# Altium PCB JH MCU Board.PcbDoc
Units mm, origin at the board's own origin, x right, y up, seen from the top; angles counter-clockwise.
Board outline 96 x 90.1 mm, 2 copper layers (Top Layer, Bottom Layer); 11 components, 65 nets, 222 pads, 102 vias.
Unrouted connection lines stored in the file: 47.
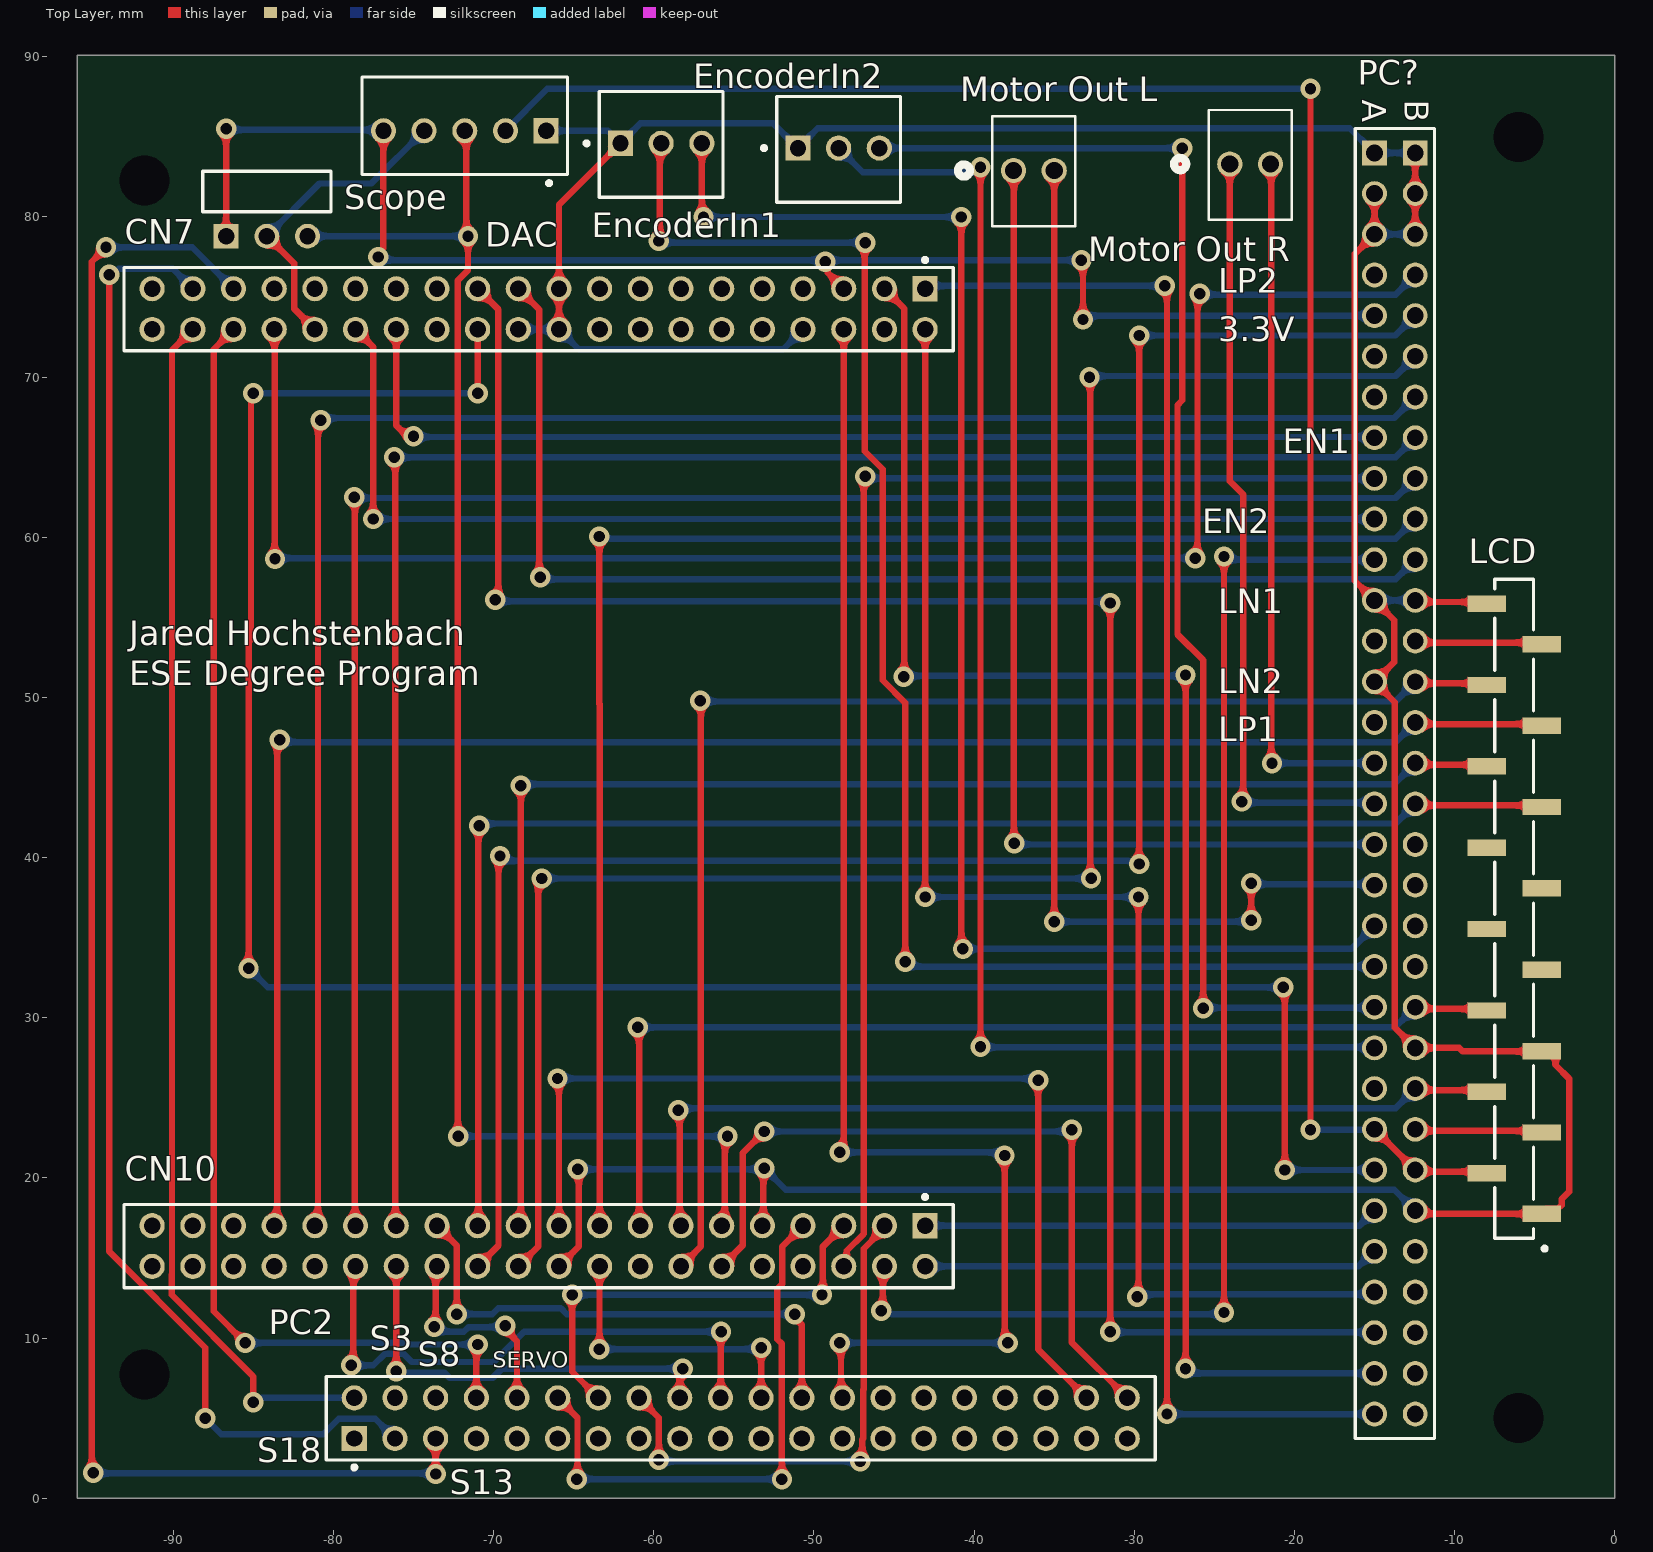
[diagram p0: Top Layer view]
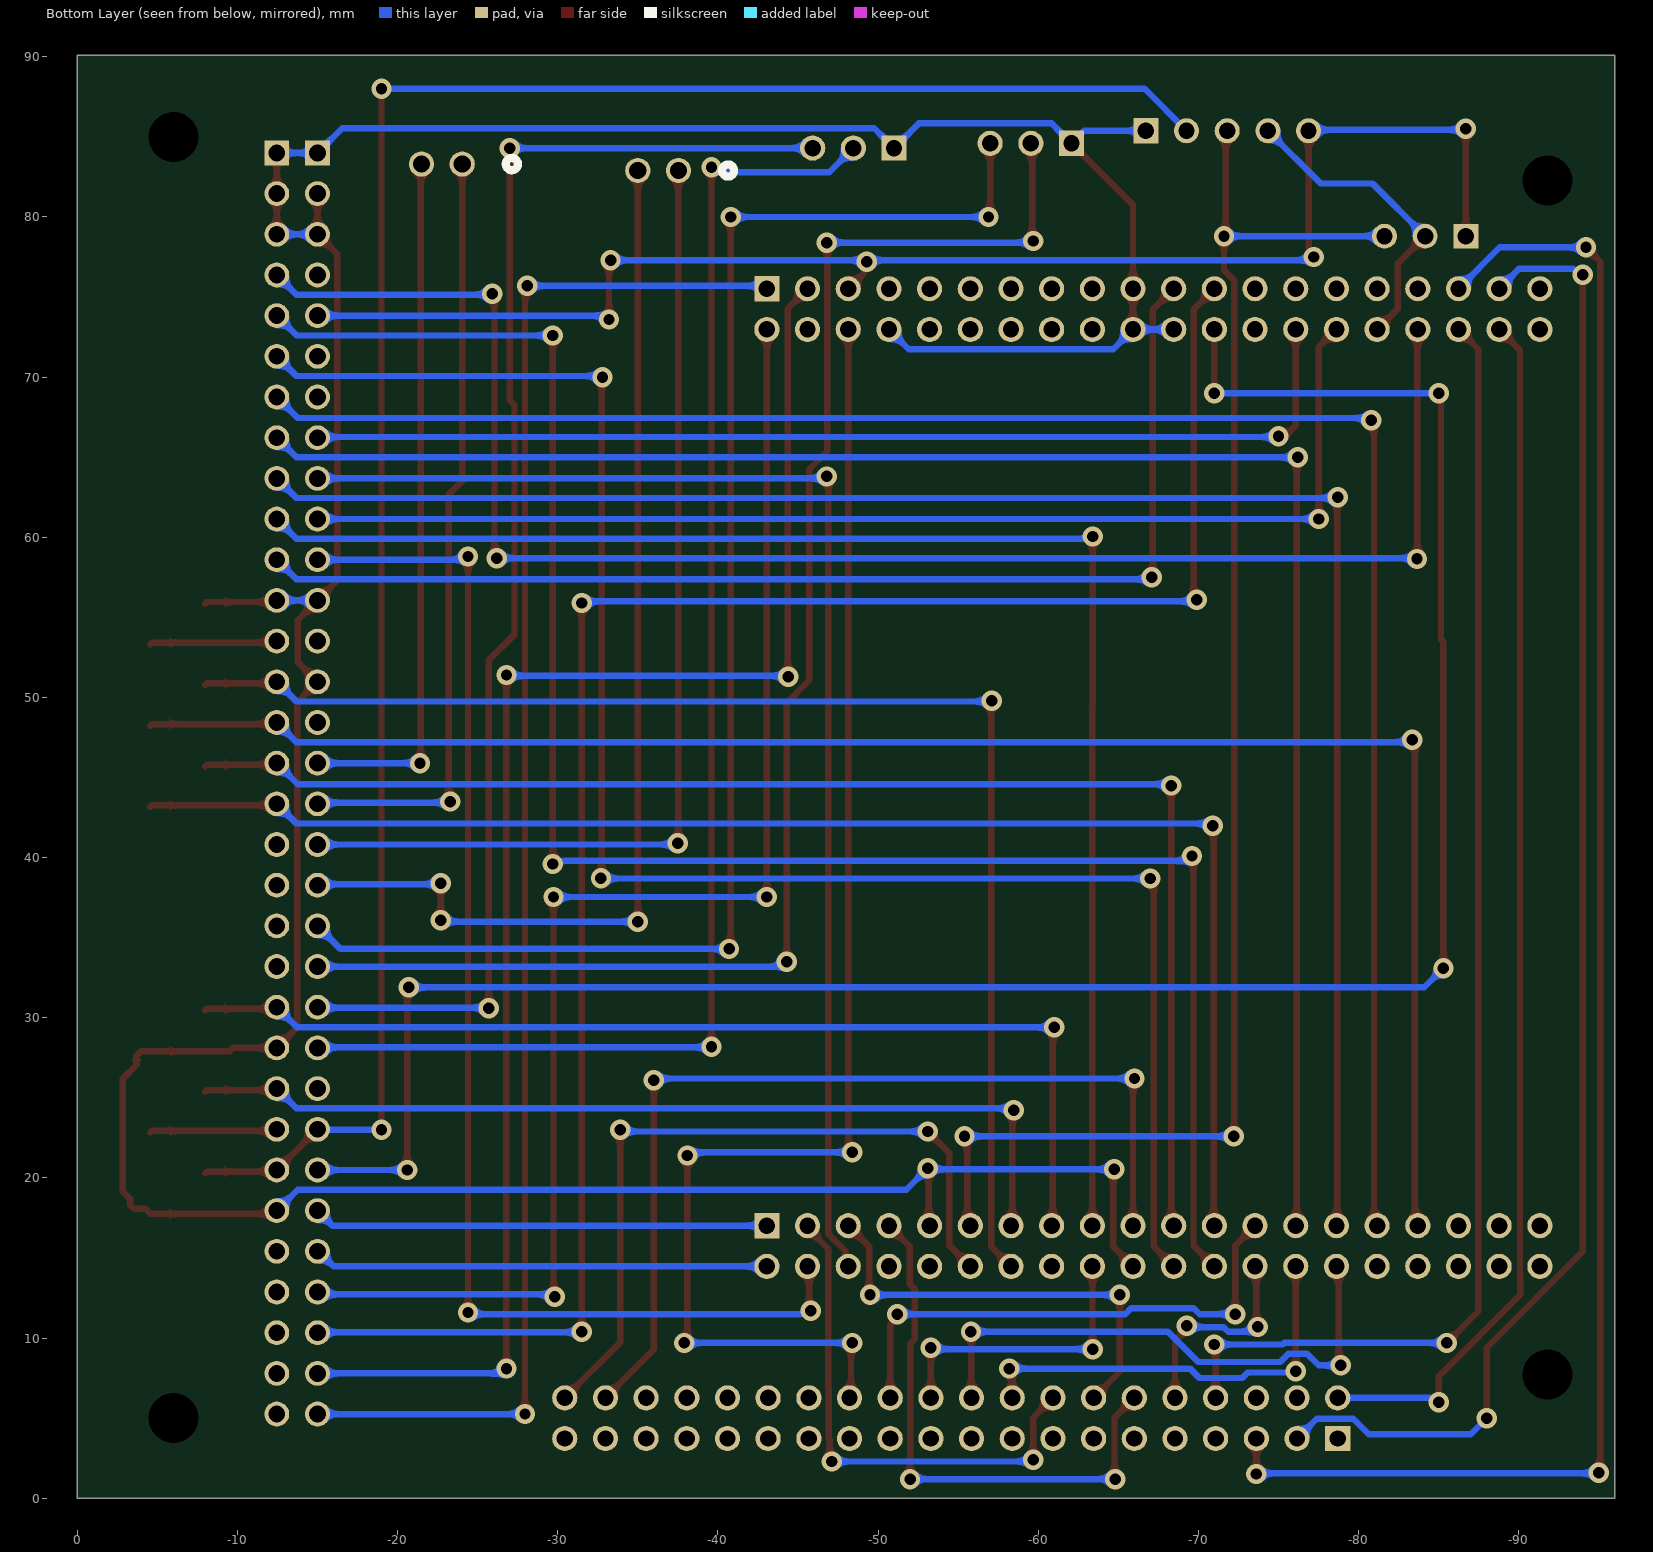
[diagram p1: Bottom Layer view, seen from below]
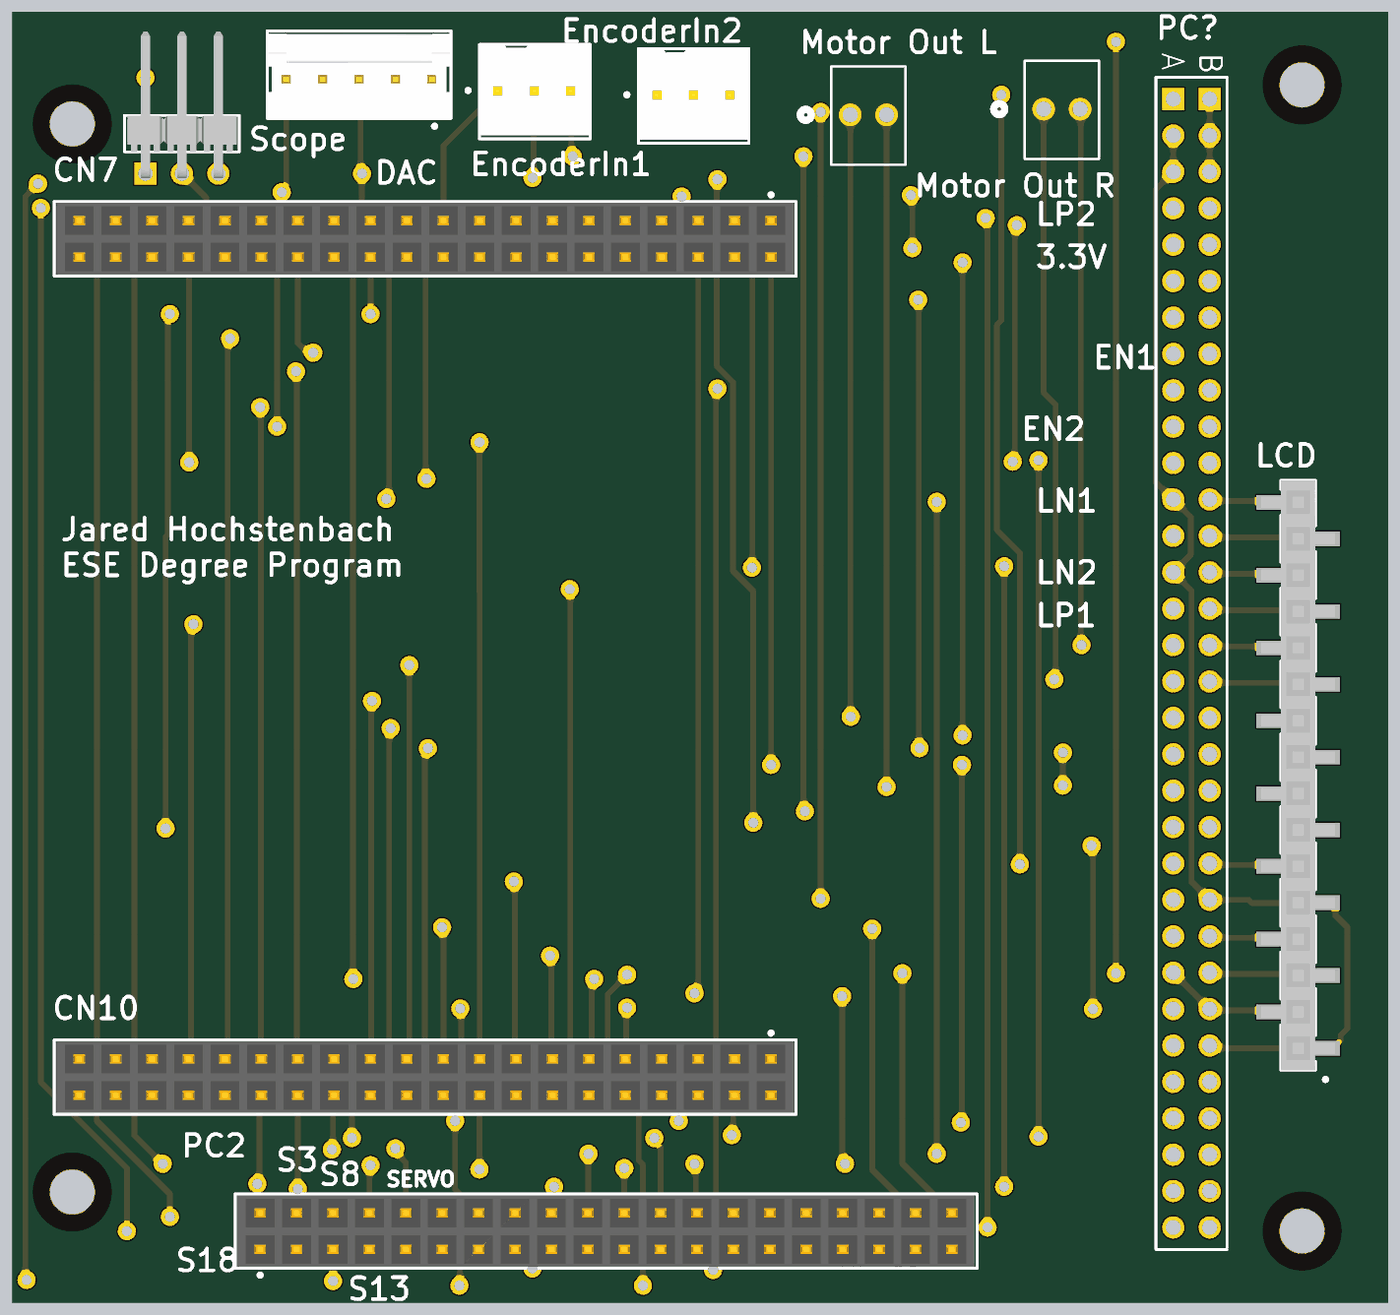
[diagram p2: 3D render of the assembled board from above, using the file's embedded part models]

## Layer stack, top to bottom
Top Solder: solder mask 0.0102, Solder Resist, Dk 3.5
Top Layer: signal copper 0.0356
Dielectric 1: dielectric 0.32, FR-4, Dk 4.8
Bottom Layer: signal copper 0.0356
Bottom Solder: solder mask 0.0102, Solder Resist, Dk 3.5

## Board outline
-96,0 0,0 0,90.1 -96,90.1

## Design rules (kind name [scope] priority, off if disabled: settings)
Clearance [All] p1: gap=0.254 ignorepadtopadclearanceinfootprint=FALSE except(0: Arc-Hole Track-Hole SMDPad-Hole THPad-Hole Via-Hole Fill-Hole Poly-Hole Region-Hole Text-Hole)
PolygonConnect [All] p1: connectstyle=Relief reliefconductorwidth=0.254 reliefentries=4 polygonreliefangle="90 Angle" airgapwidth=0.254
RoomDefinition "JH MCU Board 2" [InComponentClass('JH MCU Board 2')] p1: confinementstyle=ConfineIn formatcopy=TRUE lockcomponents=FALSE outline -96,0 0,0 0,90 -96,90
RoomDefinition "JH MCUBoardsheet" [InComponentClass('JH MCUBoardsheet')] p2: confinementstyle=ConfineIn formatcopy=TRUE lockcomponents=FALSE outline -96,0 0,0 0,90 -96,90
RoutingVias [All] p1: holewidth=0.711 width=1.27 viastyle="Through Hole" minholewidth=0.711 minwidth=1.27 maxholewidth=0.711 maxwidth=1.27
SolderMaskExpansion [All] p1: expansion=0.102 istentingtop=FALSE
Width [All] p1: maxlimit=1 minlimit=0.254 preferedwidth=0.4 minimp=50.000000 maximp=50.000000 favimp=50.000000
30 further rules are at their usual default settings.

## Classes and differential pairs
component class "JH MCU Board 2": DAC EncoderIn1 EncoderIn2 "Motor Out L" "Motor Out R" "Scope "
component class "JH MCUBoardsheet": CN7 CN10 LCD PC2 PC?

## Components (designator, comment, footprint, x,y, rotation, side; value= is the part's Value field where it differs from the comment)
CN7 "M20-6102045" FP-M20-6102045-MFG -67.19,74.25 r180 top
CN10 "M20-6102045" FP-M20-6102045-MFG -67.19,15.75 r180 top
DAC "3-641215-5" FP-3-641215-5-MFG -71.8,85.7 r0 top (schematic designator ?)
EncoderIn1 "22-11-2032" FP-22-11-2032-MFG -59.54,84.525 r0 top
EncoderIn2 "22-11-2032" FP-22-11-2032-MFG -48.46,84.225 r0 top
LCD "SSW-116-22-F-S-VS" SMTC-SSW-116-22-X-S-VS -6.285,36.81 r90 top (schematic designator J?)
"Motor Out L" "22112022" CONN_22-11-2022_MOL -37.54,82.9 r0 top
"Motor Out R" "22112022" CONN_22-11-2022_MOL -24.04,83.3 r0 top
PC2 "M20-6102045" FP-M20-6102045-MFG -54.57,5 r0 top
PC? "PC104-CN-2P-F-R64" BTB2-54-V64F-04 -15,84 r270 top
Scope "TSW-103-08-L-S-RA" SMTC-TSW-103-08-X-S-RA -86.7,78.8 r0 top (schematic designator "Scope Connector?")

## Footprints (in the part's own frame and the unit in brackets; to place one, negate y for a bottom-side part, rotate by r counter-clockwise, add the part's x,y. Pads: shape width x height; smd on the part's side, far side on the other; paste and mask are expansions set on the pad)
BTB2-54-V64F-04 [mm] "Board-to-Board Connector, PC104 BA ISA, Stackthrough, Vertical, 2-Row, 64-Postion, Pitch 2.54mm,  Receptacle , Height 11.05mm"
  rect 1.55x1.55 hole 1.05: A1(0,0) B1(0,2.54)
  round 1.55 hole 1.05: A2(2.54,0) A3(5.08,0) A4(7.62,0) A5(10.16,0) A6(12.7,0) A7(15.24,0) A8(17.78,0) A9(20.32,0) A10(22.86,0) A11(25.4,0) A12(27.94,0) A13(30.48,0) A14(33.02,0) A15(35.56,0) A16(38.1,0) A17(40.64,0) A18(43.18,0) A19(45.72,0) A20(48.26,0) A21(50.8,0) A22(53.34,0) A23(55.88,0) A24(58.42,0) A25(60.96,0) A26(63.5,0) A27(66.04,0) A28(68.58,0) A29(71.12,0) A30(73.66,0) A31(76.2,0) A32(78.74,0) B2(2.54,2.54) B3(5.08,2.54) B4(7.62,2.54) B5(10.16,2.54) B6(12.7,2.54) B7(15.24,2.54) B8(17.78,2.54) B9(20.32,2.54) B10(22.86,2.54) B11(25.4,2.54) B12(27.94,2.54) B13(30.48,2.54) B14(33.02,2.54) B15(35.56,2.54) B16(38.1,2.54) B17(40.64,2.54) B18(43.18,2.54) B19(45.72,2.54) B20(48.26,2.54) B21(50.8,2.54) B22(53.34,2.54) B23(55.88,2.54) B24(58.42,2.54) B25(60.96,2.54) B26(63.5,2.54) B27(66.04,2.54) B28(68.58,2.54) B29(71.12,2.54) B30(73.66,2.54) B31(76.2,2.54) B32(78.74,2.54)
  silkscreen extent -1.52,-1.2 80.27,3.75, body extent -1.6,-1.2 80.34,3.75, height 11.05
CONN_22-11-2022_MOL [mil]
  round 62 hole 42 mask+0: 1(0,0) 2(100,0)
  silkscreen extent -137,-137 152,133, body extent 0,0 10,10, height 10
FP-3-641215-5-MFG [mil]
  rect 61.65x61.65 hole 40 paste-39370.1 mask+0: 1(200,-12.5)
  round 61.65 hole 40 paste-39370.1 mask+0: 2(100,-12.5) 3(0,-12.5) 4(-100,-12.5) 5(-200,-12.5)
  silkscreen extent -252,-146 252,120, body extent -256,-124 256,124, height 10
FP-22-11-2032-MFG [mm]
  rect 1.57x1.57 hole 1.02 paste-1000 mask+0: 1(-2.54,0.075)
  round 1.57 hole 1.02 paste-1000 mask+0: 2(0,0.075) 3(2.54,0.075)
  silkscreen extent -4.78,-3.3 3.86,3.3, body extent -3.96,-3.4 3.96,3.4, height 0.25
FP-M20-6102045-MFG [mm]
  rect 1.57x1.57 hole 1.02 paste-1000 mask+0: 1(-24.13,-1.27)
  round 1.57 hole 1.02 paste-1000 mask+0: 2(-24.13,1.27) 3(-21.59,-1.27) 4(-21.59,1.27) 5(-19.05,-1.27) 6(-19.05,1.27) 7(-16.51,-1.27) 8(-16.51,1.27) 9(-13.97,-1.27) 10(-13.97,1.27) 11(-11.43,-1.27) 12(-11.43,1.27) 13(-8.89,-1.27) 14(-8.89,1.27) 15(-6.35,-1.27) 16(-6.35,1.27) 17(-3.81,-1.27) 18(-3.81,1.27) 19(-1.27,-1.27) 20(-1.27,1.27) 21(1.27,-1.27) 22(1.27,1.27) 23(3.81,-1.27) 24(3.81,1.27) 25(6.35,-1.27) 26(6.35,1.27) 27(8.89,-1.27) 28(8.89,1.27) 29(11.43,-1.27) 30(11.43,1.27) 31(13.97,-1.27) 32(13.97,1.27) 33(16.51,-1.27) 34(16.51,1.27) 35(19.05,-1.27) 36(19.05,1.27) 37(21.59,-1.27) 38(21.59,1.27) 39(24.13,-1.27) 40(24.13,1.27)
  silkscreen extent -25.88,-3.19 25.88,2.6, body extent -25.98,-2.7 25.98,2.7, height 0.25
SMTC-SSW-116-22-X-S-VS [mm] "SQ Post Socket, 16 Pins, Vertical, 2.54mm Pitch, Female"
  rect 1.02x2.41 smd: 1(-19.05,-1.715) 2(-16.51,1.715) 3(-13.97,-1.715) 4(-11.43,1.715) 5(-8.89,-1.715) 6(-6.35,1.715) 7(-3.81,-1.715) 8(-1.27,1.715) 9(1.27,-1.715) 10(3.81,1.715) 11(6.35,-1.715) 12(8.89,1.715) 13(11.43,-1.715) 14(13.97,1.715) 15(16.51,-1.715) 16(19.05,1.715)
  silkscreen extent -21.35,-2.03 20.58,1.2, body extent -20.57,-2.58 20.57,2.58, height 9.78
SMTC-TSW-103-08-X-S-RA [mm] ".025 SQ Post Terminal Strip Assembly, 1x3 Pins, Right Angle, 2.54mm Pitch, Male"
  rect 1.55x1.55 hole 1.02: 1(0,0)
  round 1.55 hole 1.02: 2(2.54,0) 3(5.08,0)
  silkscreen extent -1.46,1.52 6.54,4.06, body extent -1.27,-0.32 6.35,9.9, height 3.05

## Part data
CN7 CN10 PC2: library part CMP-15831-000080-1, "CONN STKTHRU PC/104 40POS PCB", Color=Black, Contact Resistance=30mR, Current Rating=3A, Flammability Rating="UL94 V-0", Insulation Resistance=5GR, Max Operating Temperature=105°C, Min Operating Temperature=-55°C, Package Quantity=11, Contact Material=Bronze, Contact Plating=Gold, Depth=5.25mm, Gender=Receptacle, Housing Color=Black, Housing Material=Nylon, Length=51.46mm, Material=Nylon, Max Current Rating=3A, Mount="Through Hole", Number of Contacts=40, Number of Positions=40, Number of Rows=2, Orientation=Straight, Packaging=Rail/Tube, Pitch=2.54mm, Radiation Hardening=No, REACH SVHC="No SVHC", Series=M20, Termination=Solder, Weight=0.218205oz
DAC: library part CMP-03369-000062-1, "CONN HEADER VERT 5POS 2.54MM", Current Rating=5A, Manufacturer="TE Connectivity", Temperature="-55°C to +105°C", Temperature Range High=+105°C, Temperature Range Low=-55°C, Voltage Rating=250V, Automotive=No, Category=Conn, ComponentLink2Description=Datasheet, ComponentLink2URL=https://www.te.com/commerce/DocumentDelivery/DDEController?Action=showdoc&DocId=Specification+Or+Standard%7F108-1050%7FL%7Fpdf%7FEnglish%7FENG_SS_108-1050_L.pdf%7F3-641215-5, Conn Gender=Male, Conn Orientation=Vertical, Contact Material=Gold,Nickel, Device Class L1=Connectors, Device Class L2="Headers and Wire Housings", Device Class L3=unset, Digikey Description="CONN HEADER VERT 5POS 2.54MM", Footprint Url=https://www.te.com/commerce/DocumentDelivery/DDEController?Action=showdoc&DocId=Customer+Drawing%7F641215%7FZ4%7Fpdf%7FEnglish%7FENG_CD_641215_Z4.pdf%7F3-641215-5, Height=0.415inch, Lead Free=Yes, Manufacturer Part Number=3-641215-5, Mouser Description="Headers & Wire Housings FRICTION LCK HDR 5P Straight Post gold", Number of Contacts=5, Number of Rows=1, Octopart=https://octopart.com/3-641215-5-te+connectivity-40938285, Package=3-641215-5, Pitch=2.54mm, RoHS=TRUE
EncoderIn1 EncoderIn2: library part CMP-04776-000113-1, "CONN HEADER VERT 3POS 2.54MM", Current Rating=4A, Manufacturer=Molex, Temperature="-40°C to +80°C", Temperature Range High=+80°C, Temperature Range Low=-40°C, Voltage Rating=500V, Automotive=No, Category=Conn, ComponentLink2Description=Datasheet, ComponentLink2URL=https://www.molex.com/webdocs/datasheets/pdf/en-us/0022112032_PCB_HEADERS.pdf, Conn Gender=Male, Conn Orientation=Vertical, Contact Material=Gold,Nickel, Device Class L1=Connectors, Device Class L2="Headers and Wire Housings", Device Class L3=unset, Digikey Description="CONN HEADER VERT 3POS 2.54MM", Footprint Url=https://www.molex.com/pdm_docs/sd/022112032_sd.pdf, Height=10.91mm, Lead Free=Yes, Manufacturer Part Number=22-11-2032, Mounting Type="Through Hole", Mouser Description="KK® 254 Solid Header, Vertical, with Friction Lock, 3 Circuits, Gold (Au) Plating", Number of Contacts=3, Number of Rows=1, Octopart=https://octopart.com/22-11-2032-molex-10085, Package=22-11-2032, Pitch=2.54mm, RoHS=TRUE
LCD: library part CMP-1023-00451-1, "SQ Post Socket, Surface Mount, Vertical, -55 to 125 degC, 2.54 mm Pitch, 16-Pin, Female, RoHS", Manufacturer=Samtec, Temperature Range="-55 to 125 degC", ComponentLink1Description="Manufacturer URL", ComponentLink1URL=http://www.samtec.com, ComponentLink2Description=Datasheet, ComponentLink2URL=http://www.samtec.com/documents/webfiles/pdf/SSW_SM.PDF, ComponentLink3Description="Package Specification", ComponentLink3URL=http://www.samtec.com/documents/webfiles/cpdf/SSW-1XX-22-XXX-X-XX-XX-X-XX-MKT.pdf, DatasheetVersion=F-214, Mounting Technology="Surface Mount", Orientation=Vertical, PackageDescription=".100 [2.54] Surface Mount Assembly", PackageReference=SSW-116-22-X-S-VS, PackageVersion="AS, 1/1997", PartNumber=SSW-116-22-F-S-VS, Pitch="2.54 mm", RoHS=True
"Motor Out L" "Motor Out R": "No Description Available", Mfr_Name="Molex Connector Corporation", Copyright="Copyright (C) 2023 Ultra Librarian. All rights reserved.", Manufacturer_Part_Number=22112022, RefDes=RefDes, Type=DEV
PC?: library part CMP-0001-00110-1, "Board-to-Board Connector, PC104 BA ISA, Stackthrough, Vertical, 2-Row, 64-Postion, Pitch 2.54mm,  Receptacle, Height 11.05mm", Package Reference=BTB2-54-V64F-04, ClassName="Board Template Connector", Mating Connector="Harwin-M20-6103205 (stackthrough)", Publisher=Altium
Scope: library part CMP-1024-00343-1, "0.025\" SQ Post Header, Through-hole, Right Angle, -55 to 125 degC, 2.54 mm Pitch, 3-Pin, Male, RoHS", Manufacturer=Samtec, Temperature Range="-55 to 125 degC", ComponentLink1Description="Manufacturer URL", ComponentLink1URL=http://www.samtec.com, ComponentLink2Description=Datasheet, ComponentLink2URL=http://www.samtec.com/documents/webfiles/pdf/TSW_TH.PDF, ComponentLink3Description="Package Specification", ComponentLink3URL=http://www.samtec.com/documents/webfiles/cpdf/TSW-XXX-XX-XXX-X-XX-XXX-MKT.pdf, DatasheetVersion=F-214, Mounting Technology=Through-hole, Orientation="Right Angle", PackageDescription=".025[0.64] SQ. Post Terminal Strip Assembly", PackageReference=TSW-103-08-X-S-RA, PackageVersion="DM, 8/1988", PartNumber=TSW-103-08-L-S-RA, Pitch="2.54 mm", RoHS=True

## Free pads (board coordinates)
  round 1.524 hole 3.12 mask+2: 4(-91.81,7.735) 4(-91.81,82.265) 4(-6.01,5.01) 4(-6.01,84.99)

## Via types
v1: diameter 1.27, hole 0.711, Top Layer to Bottom Layer, 102 vias

## Nets (pads, with @x,y where several pads share a name; then routed paths per layer and width w, separated by ;. In a path a pad name is that pad's centre, name@x,y a point inside that pad or via, vN(x,y) a via of type N, cw(c..) or ccw(c..) an arc to the next point about the centre after c; other vN are vias at no path point)
3.3V: CN7.5 DAC.5 PC?.A5 Scope.1 | length 92.5
  Top Layer w0.4: Scope.1 v1(-86.7,85.5) v1@-86.6,85.6 ; -76.88,78.055 DAC.5 ; v1(-49.3,77.2) -49.134,77.034 -49.134,76.514 CN7.5 ; v1(-33.2,73.6) v1@-33.2,77.6
  Bottom Layer w0.4: v1(-86.7,85.5) -86.641,85.441 -76.939,85.441 DAC.5 ; v1(-77.2,77.5) -77,77.3 v1(-33.3,77.3) ; v1(-33.2,73.6) -32.96,73.84 PC?.A5
+5: DAC.2 LCD.2 PC?.A25 PC?.B26 | length 128.5
  Top Layer w0.4: v1(-19,23) v1(-19,88) ; PC?.A25 PC?.B26 -12.36,20.4 -8.1,20.4 LCD.2
  Bottom Layer w0.4: DAC.2 -66.643,88 v1(-19,88) ; v1(-19,23) -18.98,23.02 -15.02,23.02 PC?.A25
+BAT: CN7.24 PC?.A26 | length 136.3
  Top Layer w0.4: v1(-85.3,33.1) -85.3,53.469 -85.151,53.619 -85.151,68.849 v1(-85,69) ; v1(-71,69) CN7.24 ; v1@-20.8,32 v1(-20.7,31.9) -20.6,31.8 v1(-20.6,20.5)
  Bottom Layer w0.4: v1(-85.3,33.1) -84.1,31.9 v1(-20.7,31.9) ; v1(-85,69) v1(-71,69) ; v1(-20.6,20.5) PC?.A26
CRX: CN10.3 PC2.16 | length 32.4
  Top Layer w0.4: PC2.16 -59.681,5.031 -59.681,2.419 v1(-59.7,2.4) ; v1(-47.1,2.3) -46.981,2.419 -46.981,3.673 -46.919,3.735 -46.919,6.783 -46.901,6.801 -46.901,15.582 -45.6,16.883 CN10.3
  Bottom Layer w0.4: v1(-59.7,2.4) -59.6,2.3 v1(-47.1,2.3)
CTS: CN10.28 PC2.18 | length 26.9
  Top Layer w0.4: v1(-76.078,7.942) CN10.28@-76.079,14.479 ; PC2.18 -58.38,8.22 v1@-58.3,8.3
  Bottom Layer w0.4: v1(-76.078,7.942) -75.993,7.857 -73.086,7.857 -72.738,7.509 -70.066,7.509 -69.475,8.1 v1(-58.2,8.1)
CTX: CN10.5 PC2.14 | length 27.6
  Top Layer w0.4: v1(-65.1,12.7) -65.1,7.91 PC2.14 ; v1(-49.5,12.7) -49.441,12.759 -49.441,15.719 CN10.5
  Bottom Layer w0.4: v1(-65.1,12.7) v1(-49.5,12.7)
D1: CN10.23 LCD.11 PC?.B17 | length 92
  Top Layer w0.4: CN10.23 -70.95,17.07 -70.95,41.95 v1(-70.9,42) ; PC?.B17 -12.36,43.26 -4.67,43.26 LCD.11
  Bottom Layer w0.4: v1(-70.9,42) -70.769,42.131 -13.689,42.131 PC?.B17
D2: CN10.21 LCD.12 PC?.B16 | length 88.5
  Top Layer w0.4: CN10.21 -68.3,17.18 v1(-68.3,44.5) ; PC?.B16 -12.36,45.8 -8.1,45.8 LCD.12
  Bottom Layer w0.4: v1(-68.3,44.5) -68.211,44.589 -13.771,44.589 PC?.B16
D3: CN10.33 LCD.13 PC?.B15 | length 110.1
  Top Layer w0.4: CN10.33 -83.522,17.198 -83.522,47.189 v1(-83.356,47.356) ; PC?.B15 -12.36,48.34 -4.67,48.34 LCD.13
  Bottom Layer w0.4: v1@-83.5,47.5 -83.211,47.211 -13.689,47.211 PC?.B15
D4: CN10.14 LCD.14 PC?.B14 | length 85.6
  Top Layer w0.4: CN10.14 -57.061,15.719 -57.061,49.761 v1(-57.1,49.8) ; PC?.B14 -12.36,50.88 -8.1,50.88 LCD.14
  Bottom Layer w0.4: v1(-57.1,49.8) -57.051,49.751 -13.689,49.751 PC?.B14
DAC1: CN7.32 DAC.4 Scope.2 | length 19.6
  Top Layer w0.4: Scope.2 -82.461,77.101 -82.461,74.281 CN7.32
  Bottom Layer w0.4: Scope.2 -80.87,82.09 -77.633,82.09 DAC.4
DAC2: CN10.11 DAC.3 Scope.3 | length 95.8
  Top Layer w0.4: v1(-72.2,22.6) -72.239,22.639 -72.239,76.033 -71.6,76.672 v1(-71.6,78.8) -71.7,78.9 -71.7,85.282 DAC.3 ; CN10.11 -55.566,17.214 -55.566,22.434 v1(-55.4,22.6)
  Bottom Layer w0.4: Scope.3 v1(-71.6,78.8) v1@-71.5,78.7 ; v1(-72.2,22.6) v1(-55.4,22.6)
DR1: CN7.3 PC?.A31 | length 97.5
  Top Layer w0.4: CN7.3 -44.361,74.281 -44.361,51.339 v1(-44.4,51.3) ; v1@-27,51.6 v1(-26.8,51.4) v1(-26.8,8.1)
  Bottom Layer w0.4: v1(-44.4,51.3) -44.35,51.35 -26.85,51.35 v1(-26.8,51.4) ; v1@-26.5,7.7 -26.4,7.8 PC?.A31
DR2: CN7.23 PC?.A30 | length 120.4
  Top Layer w0.4: CN7.23 -69.7,74.22 v1@-69.7,56.2 ; v1(-31.5,10.4) v1(-31.5,55.9)
  Bottom Layer w0.4: v1(-69.9,56.1) -69.8,56 -31.6,56 v1(-31.5,55.9) ; v1(-31.5,10.4) -31.47,10.37 -15.03,10.37 PC?.A30
DR3: CN10.2 PC?.A28 | length 28.4
  Bottom Layer w0.4: CN10.2 -16.005,14.48 -15.065,15.42 PC?.A28
DR4: CN10.1 PC?.A27 | length 28.4
  Bottom Layer w0.4: CN10.1 -15.94,17.02 PC?.A27
DR5: CN7.1 PC?.A32 | length 98.6
  Top Layer w0.4: v1(-28.089,75.7) -27.96,75.571 v1(-27.96,5.26)
  Bottom Layer w0.4: CN7.1 -42.88,75.7 v1(-28.089,75.7) ; v1@-28,5.3 v1(-27.96,5.26) PC?.A32
DR6: CN7.2 PC?.A29 | length 89.2
  Top Layer w0.4: v1@-43.2,37.4 v1(-43.06,37.54) CN7.2 ; v1@-29.9,12.5 v1(-29.82,12.58) -29.74,12.66 v1(-29.74,37.54)
  Bottom Layer w0.4: v1(-43.06,37.54) v1(-29.74,37.54) v1@-29.6,37.4 ; v1(-29.82,12.58) -29.67,12.73 -15.15,12.73 PC?.A29
E: CN10.15 LCD.6 PC?.B22 | length 66.1
  Top Layer w0.4: v1(-61,29.4) -60.92,29.32 -60.92,17.1 CN10.15 ; PC?.B22 -12.36,30.56 -8.1,30.56 LCD.6
  Bottom Layer w0.4: v1(-61,29.4) -13.72,29.4 PC?.B22
E5V: CN7.6 PC2.26 | length 87.6
  Top Layer w0.4: v1(-48.4,9.7) -48.31,9.61 -48.31,6.36 PC2.26 ; v1@-48.4,21.3 -48.14,21.56 CN7.6 ; v1(-38.1,21.4) -38.1,9.9 v1(-37.9,9.7)
  Bottom Layer w0.4: v1(-48.4,9.7) v1(-37.9,9.7) ; v1(-48.4,21.6) -38.5,21.6 v1@-38.4,21.5
E12: EncoderIn1.2 PC?.A21 | length 94.3
  Top Layer w0.4: v1(-59.7,78.5) -59.62,78.58 -59.62,84.52 EncoderIn1.2 ; v1@-46.8,78.2 -46.839,78.161 -46.839,65.379 -45.711,64.251 -45.711,51.071 -44.3,49.66 v1(-44.3,33.5)
  Bottom Layer w0.4: v1(-59.7,78.5) -59.6,78.4 v1(-46.8,78.4) ; v1(-44.3,33.5) -44,33.2 PC?.A21
E13: EncoderIn1.3 PC?.A20 | length 92.9
  Top Layer w0.4: EncoderIn1.3 -57,80.1 v1(-56.9,80) ; v1(-40.8,80) -40.8,34.4 v1(-40.7,34.3)
  Bottom Layer w0.4: v1(-56.9,80) v1(-40.8,80) v1@-40.7,79.9 ; v1(-40.7,34.3) -16.44,34.3 PC?.A20
E22: EncoderIn2.2 PC?.A23 | length 89.3
  Top Layer w0.4: v1(-39.6,83.1) v1(-39.6,28.2) v1@-39.4,28
  Bottom Layer w0.4: EncoderIn2.2 -46.96,82.8 v1@-39.6,82.8 ; v1(-39.6,28.2) -39.56,28.16 -15.04,28.16 PC?.A23
E23: EncoderIn2.3 PC?.A22 | length 84.1
  Top Layer w0.4: v1(-27,84.3) -27,68.549 -27.3,68.249 -27.3,53.935 -25.7,52.335 v1(-25.7,30.6)
  Bottom Layer w0.4: EncoderIn2.3 v1(-27,84.3) ; v1(-25.7,30.6) -25.67,30.63 -15.03,30.63 PC?.A22
EC: CN10.19 PC2.38 | length 60.6
  Top Layer w0.4: v1@-66.1,26.3 v1(-66.01,26.21) -65.92,26.12 CN10.19 ; v1(-36.005,26.105) -36.005,9.295 PC2.38
  Bottom Layer w0.4: v1(-66.01,26.21) -36.11,26.21 v1(-36.005,26.105) v1@-35.9,26
EN1: CN7.28 PC?.A7 PC?.A8 | length 67.4
  Top Layer w0.4: CN7.28 -76.08,66.98 v1@-75.1,66
  Bottom Layer w0.4: v1(-75,66.3) -74.96,66.26 -15.04,66.26 PC?.A8
EN2: CN7.30 PC?.A10 | length 74.8
  Top Layer w0.4: CN7.30 -77.521,71.881 v1(-77.521,61.14)
  Bottom Layer w0.4: v1(-77.521,61.14) PC?.A10
GND: CN7.8 CN7.19 CN7.20 CN7.22 CN10.9 CN10.20 DAC.1 EncoderIn1.1 EncoderIn2.1 LCD.1 LCD.5 LCD.16 PC?.A1 PC?.A2 PC?.A3 PC?.A12 PC?.A14 PC?.B1 PC?.B2 PC?.B3 PC?.B12 PC?.B23 PC?.B27 | length 251.8
  Top Layer w0.4: CN10.20 -64.681,15.719 -64.681,20.481 v1(-64.741,20.54) v1@-64.8,20.6 ; CN7.20 CN7.19 -65.92,80.76 EncoderIn1.1 ; CN10.9 -53.16,17.08 -53.16,20.54 v1(-53.1,20.6) ; PC?.A2 PC?.A3 -16.229,77.691 -16.229,57.289 PC?.A12 -13.771,54.831 -13.771,52.209 PC?.A14 -13.73,49.71 -13.73,29.39 PC?.B23 -9.72,28.12 -9.5,27.9 -3.984,27.9 -3.694,27.61 -3.694,27.044 -2.856,26.206 -2.856,19.134 -3.325,18.666 -3.325,18.304 -3.559,18.07 -4.26,18.07 LCD.1 -12.26,17.76 PC?.B27 ; PC?.B12 -12.36,55.96 -8.1,55.96 LCD.16 ; PC?.B3 PC?.B2 PC?.B1
  Bottom Layer w0.4: CN7.22 CN7.20 -64.681,71.741 -51.919,71.741 CN7.8 ; DAC.1 -62.862,85.382 EncoderIn1.1 -60.841,85.839 -52.539,85.839 EncoderIn2.1 -49.761,85.539 -16.539,85.539 PC?.A1 PC?.B1 ; v1(-64.741,20.54) v1@-53.241,20.54 ; v1(-53.1,20.6) -51.771,19.271 -13.771,19.271 PC?.B27 ; PC?.A12 PC?.B12 ; PC?.A3 PC?.B3
KC1: CN10.27 PC?.B8 | length 112.3
  Top Layer w0.4: v1(-76.2,65) -76.14,64.94 -76.14,17.08 CN10.27
  Bottom Layer w0.4: v1(-76.2,65) -76.191,64.991 -13.689,64.991 PC?.B8
KC2: CN10.29 PC?.B9 | length 112.3
  Top Layer w0.4: v1(-78.7,62.5) -78.66,62.46 -78.66,17.06 CN10.29
  Bottom Layer w0.4: v1(-78.7,62.5) -78.651,62.451 -13.689,62.451 PC?.B9
KC3: CN10.17 PC?.B10 | length 94.5
  Top Layer w0.4: v1(-63.4,60.051) -63.4,49.611 -63.38,49.591 CN10.17
  Bottom Layer w0.4: v1(-63.4,60.051) -63.283,59.934 -62.753,59.934 -62.731,59.911 -13.689,59.911 PC?.B10
KC4: CN7.21 PC?.B11 | length 73.8
  Top Layer w0.4: CN7.21 -67.159,74.219 -67.159,57.559 v1(-67.1,57.5)
  Bottom Layer w0.4: v1(-67.1,57.5) -66.971,57.371 -13.689,57.371 PC?.B11
KR1: CN7.34 PC?.B4 | length 102.5
  Top Layer w0.4: CN7.34 -83.675,72.955 -83.675,58.675 v1(-83.65,58.65) ; v1(-26.2,58.7) -26.056,58.845 -26.056,75.055 v1(-25.911,75.2)
  Bottom Layer w0.4: v1@-83.7,58.6 v1(-83.65,58.65) -83.6,58.7 v1(-26.2,58.7) ; v1(-25.911,75.2) -25.862,75.151 -13.689,75.151 PC?.B4
KR2: CN10.24 PC?.B5 | length 117.1
  Top Layer w0.4: CN10.24 -69.699,15.781 -69.699,40.001 v1(-69.6,40.1) ; v1(-29.7,39.6) v1(-29.7,72.6)
  Bottom Layer w0.4: v1(-69.6,40.1) -69.365,40.1 -69.065,39.8 -30.369,39.8 -30.336,39.766 -29.866,39.766 v1(-29.7,39.6) ; v1(-29.7,72.6) -13.7,72.6 PC?.B5
KR3: CN10.22 PC?.B6 | length 111.3
  Top Layer w0.4: CN10.22 -67.221,15.719 -67.221,38.621 v1@-67.3,38.7 ; v1(-32.8,70) -32.75,69.95 -32.75,38.761 v1(-32.7,38.711)
  Bottom Layer w0.4: v1(-67,38.7) -32.711,38.7 v1(-32.7,38.711) ; v1(-32.8,70) -32.729,70.071 -13.689,70.071 PC?.B6
KR4: CN10.31 PC?.B7 | length 119.4
  Top Layer w0.4: CN10.31 -80.966,17.214 -80.966,67.134 v1(-80.8,67.3)
  Bottom Layer w0.4: v1(-80.8,67.3) -80.651,67.449 -13.771,67.449 PC?.B7
LO1: CN10.6 PC?.A9 | length 81.5
  Top Layer w0.4: CN10.6 -47.955,14.665 -47.955,15.453 -46.901,16.507 -46.901,63.699 v1(-46.8,63.8)
  Bottom Layer w0.4: v1@-46.6,63.8 -46.48,63.68 PC?.A9
LO2: CN10.4 PC?.A11 PC?.A15 PC?.A24 | length 80.9
  Top Layer w0.4: v1(-45.8,11.7) -45.7,11.8 -45.7,14.38 CN10.4 ; v1@-24.5,11.8 -24.4,11.9 v1(-24.4,58.8)
  Bottom Layer w0.4: v1(-45.8,11.7) -45.634,11.534 -45.173,11.534 -45.131,11.491 -24.509,11.491 v1(-24.4,11.6) ; v1(-24.4,58.8) -24.2,58.6 PC?.A11
LP2: PC?.A4
LR2: LCD.3 PC?.B25 | length 8
  Top Layer w0.4: PC?.B25 -12.36,22.94 -4.67,22.94 LCD.3
LR3: LCD.15 PC?.B13 | length 8
  Top Layer w0.4: PC?.B13 -12.36,53.42 -4.67,53.42 LCD.15
ML1: "Motor Out L.1" PC?.A18 | length 64.5
  Top Layer w0.4: -37.54,82.9 -37.52,82.88 -37.52,40.92 v1(-37.5,40.9)
  Bottom Layer w0.4: v1(-37.5,40.9) -37.42,40.82 PC?.A18
ML2: "Motor Out L.2" PC?.A19 | length 69.3
  Top Layer w0.4: v1(-35,36) -35,82.9 ; v1(-22.7,36.1) v1(-22.7,38.4)
  Bottom Layer w0.4: v1(-35,36) -22.8,36 v1(-22.7,36.1) ; v1(-22.7,38.4) -22.64,38.34 -15.06,38.34 PC?.A19
MR1: "Motor Out R.1" PC?.A17 | length 48.8
  Top Layer w0.4: -24.04,83.3 -24.04,63.511 -23.2,62.671 v1@-23.2,43.2
  Bottom Layer w0.4: v1(-23.3,43.5) -23.23,43.43 -15.07,43.43 PC?.A17
MR2: "Motor Out R.2" PC?.A16 | length 44
  Top Layer w0.4: -21.5,83.3 -21.45,83.25 -21.45,45.95 v1(-21.4,45.9)
  Bottom Layer w0.4: v1@-21.5,45.8 v1(-21.4,45.9) PC?.A16
NetCN7_9: CN7.9
NetCN7_11: CN7.11
NetCN7_17: CN7.17
NetCN7_33: CN7.33
REF: CN10.7 PC2.12 | length 35
  Top Layer w0.4: PC2.12 -64.761,5.031 -64.761,1.239 v1(-64.8,1.2) ; v1(-52,1.2) -52,9.64 -52.289,9.929 -52.289,13.072 -51.981,13.38 -51.981,15.719 CN10.7
  Bottom Layer w0.4: v1(-64.8,1.2) v1(-52,1.2)
RS: CN10.13 LCD.4 PC?.B24 | length 58.6
  Top Layer w0.4: v1(-58.474,24.226) -58.387,24.138 -58.387,17.107 CN10.13 ; PC?.B24 -12.36,25.48 -8.1,25.48 LCD.4
  Bottom Layer w0.4: v1@-58.6,24.1 v1(-58.474,24.226) -58.349,24.351 -13.689,24.351 PC?.B24
RTS: CN10.30 PC2.20 | length 34.9
  Top Layer w0.4: v1(-78.9,8.3) -78.76,8.44 -78.76,14.34 CN10.30 ; PC2.20 -55.82,6.29 -55.82,10.38 v1(-55.8,10.4)
  Bottom Layer w0.4: v1(-78.9,8.3) -77.511,8.3 -76.78,9.031 -75.627,9.031 -75.107,8.511 -69.989,8.511 -68.1,10.4 v1(-55.8,10.4) ; PC2.20 PC2.20@-55.82,6.29
S2: CN7.38 PC2.2 | length 76.1
  Top Layer w0.4: CN7.38 -90.081,71.679 -90.081,13.967 -90.1,13.948 -90.1,12.7 -85,7.6 v1(-85,6)
  Bottom Layer w0.4: v1(-85,6) -84.765,6 -84.495,6.27 PC2.2
S3: PC2.4
S8: PC2.6
S9: CN7.36 PC2.8 | length 82.1
  Top Layer w0.4: CN7.36 -87.479,71.741 -87.479,11.679 v1(-85.5,9.7) ; PC2.8 -71.08,9.12 v1@-71,9.2
  Bottom Layer w0.4: v1(-85.5,9.7) -75.371,9.7 -75.271,9.6 v1(-71,9.6)
S12: CN7.35 PC2.5 | length 109.6
  Top Layer w0.4: v1(-95,1.6) -95.089,1.689 -95.089,77.211 v1(-94.2,78.1) ; PC2.5 v1(-73.62,1.52) v1@-73.6,1.5
  Bottom Layer w0.4: v1(-95,1.6) -94.96,1.56 -73.66,1.56 v1(-73.62,1.52) ; v1(-94.2,78.1) -88.82,78.1 CN7.35
S13: PC2.7
S18: PC2.1
S19: CN7.37 PC2.3 | length 92.9
  Top Layer w0.4: v1(-94,76.4) -94,15.408 -88,9.408 v1(-88,5)
  Bottom Layer w0.4: v1(-94,76.4) -93.765,76.4 -93.406,76.759 -90.019,76.759 CN7.37 ; v1(-88,5) -87,4 -80.642,4 -79.673,4.969 -77.399,4.969 PC2.3
SERVO: CN10.26 PC2.10 | length 13
  Top Layer w0.4: v1(-73.7,10.7) -73.62,10.78 -73.62,14.4 CN10.26 ; v1(-69.27,10.77) -69.27,10.535 -68.54,9.805 PC2.10
  Bottom Layer w0.4: v1@-73.5,10.4 -71.86,10.4 -71.571,10.689 -69.351,10.689 v1(-69.27,10.77)
TR: CN10.12 PC2.40 | length 46.9
  Top Layer w0.4: CN10.12 -54.459,15.781 -54.459,21.541 v1(-53.1,22.9) ; v1(-33.9,23) -33.9,9.73 PC2.40
  Bottom Layer w0.4: v1(-53.1,22.9) -34,22.9 v1(-33.9,23)
URX: CN10.18 PC2.22 | length 18.5
  Top Layer w0.4: v1(-63.405,9.311) -63.393,9.324 -63.393,14.467 CN10.18 ; PC2.22 v1(-53.3,9.4)
  Bottom Layer w0.4: v1(-63.405,9.311) -53.389,9.311 v1(-53.3,9.4)
UTX: CN10.25 PC2.24 | length 33
  Top Layer w0.4: CN10.25 -72.301,15.781 v1(-72.301,11.499) v1@-72.4,11.4 ; v1(-51.2,11.5) -51.2,11.265 -50.76,10.825 PC2.24
  Bottom Layer w0.4: v1(-72.301,11.499) -70.081,11.499 -69.721,11.859 -65.799,11.859 -65.44,11.5 v1(-51.2,11.5)
VCC: CN7.4 CN7.7 CN7.10 CN7.12 CN7.13 CN7.14 CN7.15 CN7.16 CN7.18 CN7.25 CN7.26 CN7.27 CN7.29 CN7.31 CN10.8 CN10.10 CN10.16 CN10.32 CN10.34 CN10.35 CN10.36 CN10.37 CN10.38 PC2.9 PC2.11 PC2.13 PC2.15 PC2.17 PC2.19 PC2.21 PC2.23 PC2.25 PC2.27 PC2.28 PC2.29 PC2.30 PC2.31 PC2.32 PC2.33 PC2.34 PC2.35 PC2.36 PC2.37 PC2.39 PC?.A6
pads on no net: CN7.39 CN7.40 CN10.39 CN10.40 LCD.7 LCD.8 LCD.9 LCD.10 PC?.A13 PC?.B18 PC?.B19 PC?.B20 PC?.B21 PC?.B28 PC?.B29 PC?.B30 PC?.B31 PC?.B32

## Silkscreen, mask and mechanical layers (free items; w line width, h text height)
Top Overlay:
  text "LP2" at -24.746,75.254 h1.52
  text "3.3V" at -24.746,72.254 h1.52
  text "EN1" at -20.746,65.254 h1.52
  text "EN2" at -25.746,60.254 h1.52
  text "LN1" at -24.746,55.254 h1.52
  text "Jared Hochstenbach" at -92.746,53.254 h1.52
  text "ESE Degree Program" at -92.746,50.762 h1.52
  text "LN2" at -24.746,50.254 h1.52
  text "LP1" at -24.746,47.254 h1.52
  text "S3" at -77.746,9.254 h1.52
  text "S8" at -74.746,8.254 h1.52
  text "SERVO" at -70.046,8.154 h1
  text "S18" at -84.746,2.254 h1.52
  text "S13" at -72.746,0.254 h1.52

## Text inside footprints (layer, text, board x,y; h text height)
PC?: Top Overlay "B" at -13.118,87.332 h1.5 r270; Top Overlay "A" at -15.753,87.332 h1.5 r270